# Altium PCB I2C_Expander.PcbDoc
Units mil, origin at the board's own origin, x right, y up, seen from the top; angles counter-clockwise.
Board outline 1240 x 710 mil, 2 copper layers (Top Layer, Bottom Layer); 8 components, 4 nets, 42 pads, 20 vias.
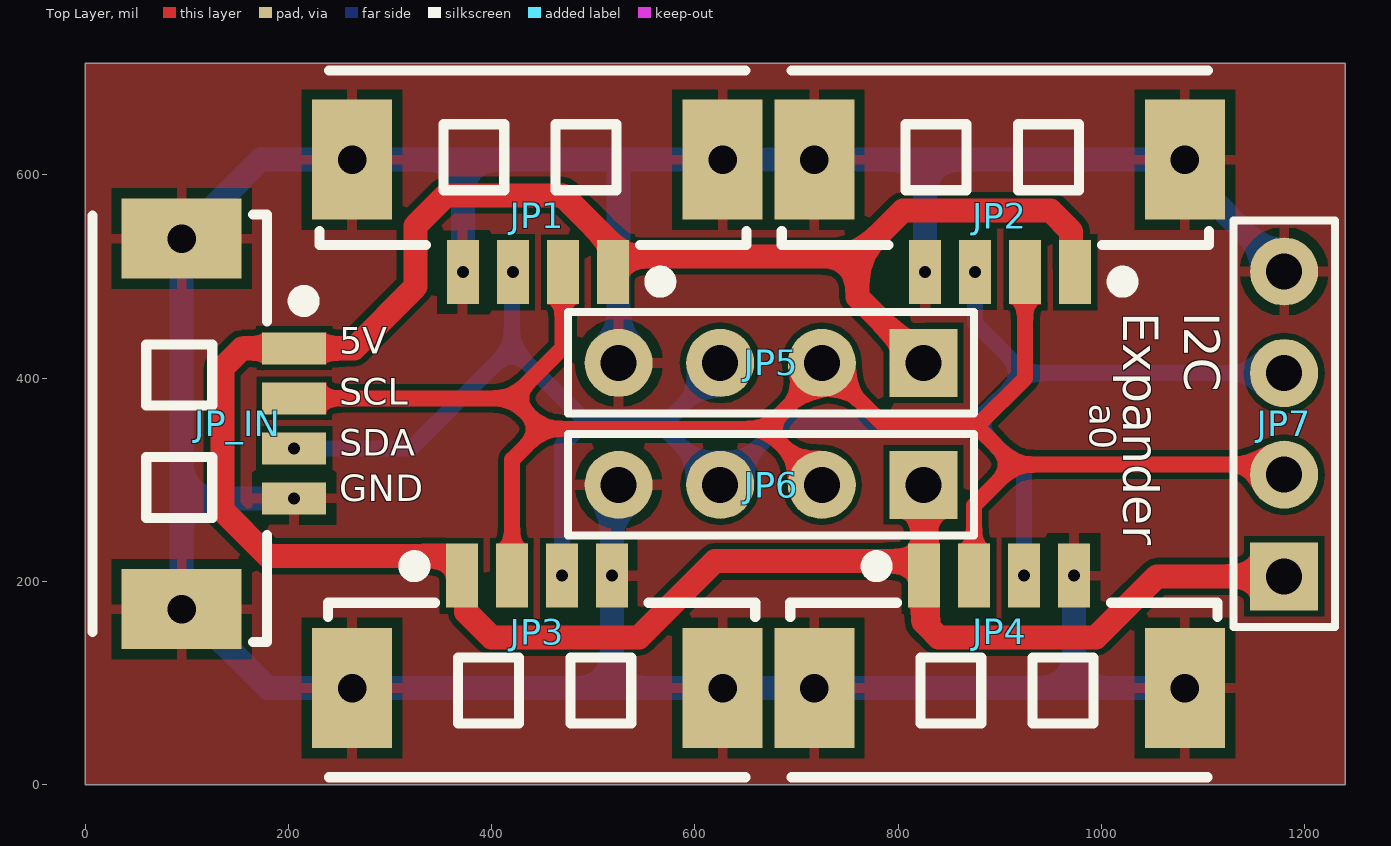
[diagram p0: Top Layer view]
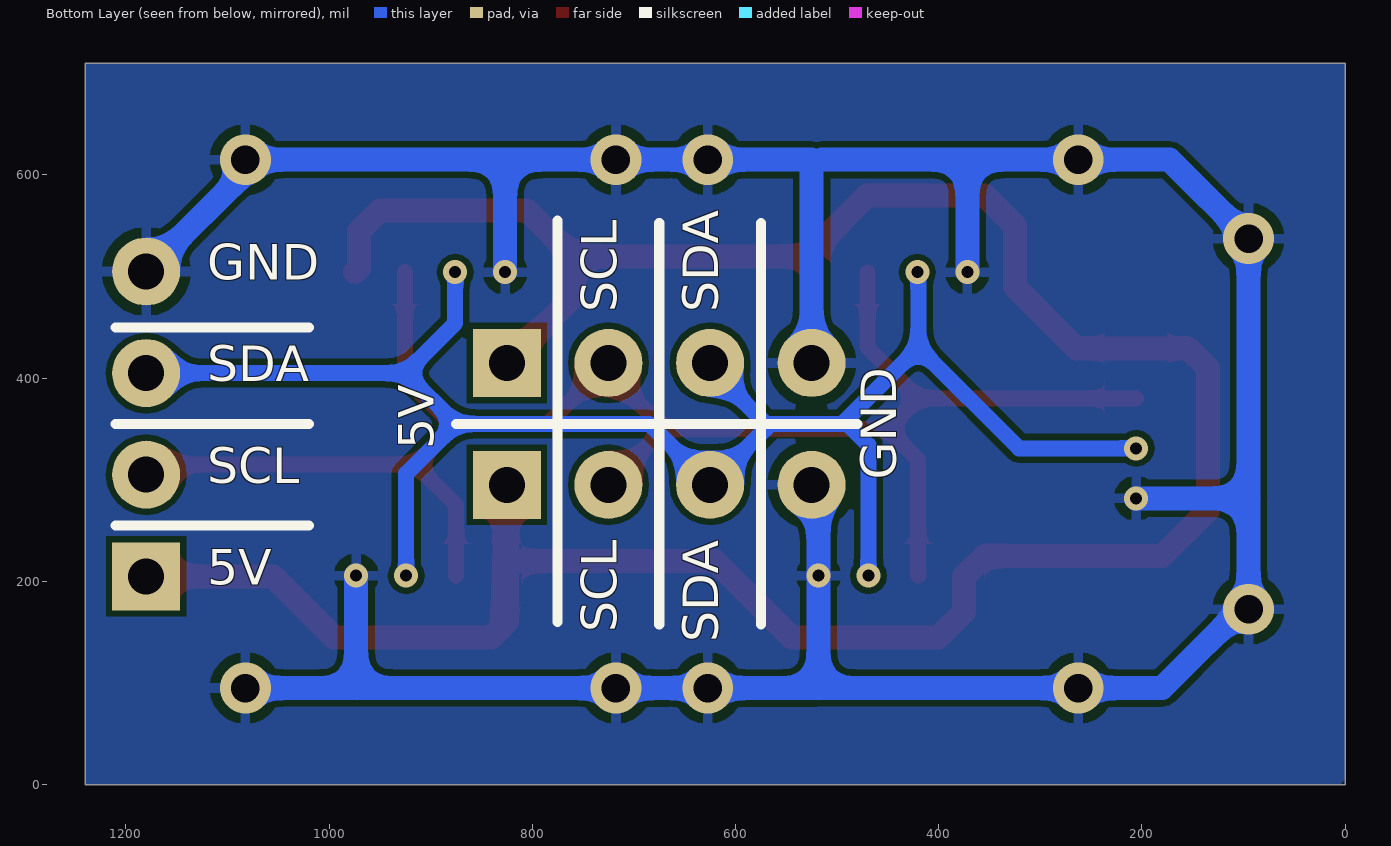
[diagram p1: Bottom Layer view, seen from below]

## Layer stack, top to bottom
Top Solder: solder mask 0.4, Solder Resist, Dk 3.5
Top Layer: signal copper 1.4
Dielectric 1: dielectric 12.6, FR-4, Dk 4.8
Bottom Layer: signal copper 1.4
Bottom Solder: solder mask 0.4, Solder Resist, Dk 3.5

## Board outline
0,0 1240,0 1240,710 0,710

## Design rules (kind name [scope] priority, off if disabled: settings)
Clearance [All] p1: gap=6 ignorepadtopadclearanceinfootprint=FALSE except(0: Arc-Hole Track-Hole SMDPad-Hole THPad-Hole Via-Hole Fill-Hole Poly-Hole Region-Hole Text-Hole)
DiffPairsRouting [All] p1: maxlimit=393.7 minlimit=6 mostfreqgap=10 toplayer_minwidth=6 toplayer_maxwidth=393.7 toplayer_prefwidth=10 bottomlayer_minwidth=6 bottomlayer_maxwidth=393.7 bottomlayer_prefwidth=10 maxuncoupledlength=500
PlaneConnect [All] p1: planeconnectstyle=Relief reliefexpansion=20 reliefentries=4 reliefconductorwidth=20 reliefairgap=10
PolygonConnect [All] p1: connectstyle=Relief reliefconductorwidth=10 reliefentries=4 polygonreliefangle="90 Angle" airgapwidth=10
RoutingTopology [All] p1: topology=Daisy_Simple
RoutingVias [All] p1: holewidth=28 width=50 viastyle="Through Hole" minholewidth=11.81 minwidth=23.62 maxholewidth=98.43 maxwidth=196.85
SolderMaskExpansion [All] p1: expansion=4
UnRoutedNet [All] p1: checkbadconnections=TRUE
Width [All] p1: maxlimit=393.7 minlimit=6 preferedwidth=10
26 further rules are at their usual default settings.

## Components (designator, comment, footprint, x,y, rotation, side; value= is the part's Value field where it differs from the comment)
JP1 "HDR-1X4" "MX 1.25-WS-4P" 445,615 r180 top
JP2 "HDR-1X4" "MX 1.25-WS-4P" 900,615 r180 top locked
JP3 "HDR-1X4" "MX 1.25-WS-4P" 445,95 r0 top locked
JP4 "HDR-1X4" "MX 1.25-WS-4P" 900,95 r0 top locked
JP5 "HDR-1X4" HDR2.54-LI-4P 675,415 r180 top
JP6 "HDR-1X4" HDR2.54-LI-4P 675,295 r180 top
JP7 "HDR-1X4" HDR2.54-LI-4P 1180,355 r90 top
JP_IN "HDR-1X4" "MX 1.25-WS-4P" 95,355 r270 top

## Footprints (in the part's own frame and the unit in brackets; to place one, negate y for a bottom-side part, rotate by r counter-clockwise, add the part's x,y. Pads: shape width x height; smd on the part's side, far side on the other; paste and mask are expansions set on the pad)
HDR2.54-LI-4P [mm] "排针，4脚"
  rect 1.7x1.7 hole 0.9: 1(-3.81,0)
  round 1.7 hole 0.9: 2(-1.27,0) 3(1.27,0) 4(3.81,0)
  silkscreen extent -5.08,-1.27 5.08,1.27, body extent -5.08,-1.27 5.08,1.27, height 8.5
"MX 1.25-WS-4P" [mm] "长：10.15mm，宽：4.2mm，高：3.4mm"
  rect 2x3 smd: 0(-4.632,0) 0(4.632,0)
  rect 0.8x1.6 smd: 1(-1.889,2.811) 2(-0.639,2.811) 3(0.611,2.811) 4(1.861,2.811)
  silkscreen extent -5.23,-2.23 5.45,3.25, body extent -5.07,-2.1 5.07,3.09, height 3.4

## Part data
JP1 JP2 JP3 JP4 JP5 JP6 JP7 JP_IN: library part "Header 4", "4P接插件", BOM名称=4P, 学习资源=www.oooc

## Via types
v1: diameter 50, hole 28, Top Layer to Bottom Layer, 10 vias
v2: diameter 23.62, hole 11.81, Top Layer to Bottom Layer, 10 vias

## Nets (pads, with @x,y where several pads share a name; then routed paths per layer and width w, separated by ;. In a path a pad name is that pad's centre, name@x,y a point inside that pad or via, vN(x,y) a via of type N, cw(c..) or ccw(c..) an arc to the next point about the centre after c; other vN are vias at no path point)
5V: JP1.1 JP2.1 JP3.1 JP4.1 JP5.1 JP6.1 JP7.1 JP_IN.1 | length 2761.2
  Top Layer w23.62: JP5.1 760,480 760,520 ; JP2.1 970.43,508.28 970.43,544.57 950,565 805,565 760,520 ; JP7.1 1055,205 995,145 840,145 830,155 ; 760,520 530,520 470,580 355,580 325,550 325,490 264.36,429.36 JP_IN.1 154.36,429.36 135,410 135,270 180,225 355,225 375,205 375,170 400,145 545,145 620,220 JP4.1@825,220 ; JP4.1@825,220 825,160 830,155 ; JP4.1@825,220 JP6.1 828.19,205.74 830,155
GND: JP1.0 JP1.4 JP2.0 JP2.4 JP3.0 JP3.4 JP4.0 JP4.4 JP5.4 JP6.4 JP7.4 JP_IN.0 JP_IN.4 | length 3378.1
  Bottom Layer w23.62: v2(205.65,281.72) 95,281.72 ; v2(371.72,504.35) 371.72,615 ; 515,615 371.72,615 ; JP6.4 518.28,288.28 v2(518.28,205.65) 518.28,95 ; JP5.4 525,615 v1(627.36,615) v1(717.64,615) 826.72,615 ; v2(826.72,504.35) 826.72,615 ; v2(973.28,205.65) 973.28,95 ; v1(1082.36,95) 973.28,95 ; JP7.4 1070,615 826.72,615 ; 95,281.72 95,180 180,95 v1(262.64,95) 518.28,95 ; 95,281.72 v1(95,537.36) 172.64,615 v1(262.64,615) 371.72,615 ; 518.28,95 v1(627.36,95) v1(717.64,95) 973.28,95
  other v1: 95,172.64 1082.36,615
SCL: JP1.2 JP2.2 JP3.2 JP4.2 JP5.2 JP6.2 JP7.2 JP_IN.2 | length 1742.4
  Top Layer w10: JP1.2@470,504.2 JP1.2
  Top Layer w15.75: JP_IN.2 420.15,380.15 ; JP3.2 420.15,205.95 420.15,319.85 450.3,350 ; JP1.2@470,504.2 470,430 420.15,380.15 ; JP6.2 670,350 ; JP4.2 874.85,274.85 915,315 ; JP2.2 925.15,400.15 877.5,352.5 ; JP7.2 1170,315 915,315 ; 420.15,380.15 450.3,350 ; 450.3,350 670,350 ; 670,350 725,405 JP5.2 785,355 875,355 877.5,352.5 ; 877.5,352.5 915,315
SDA: JP1.3 JP2.3 JP3.3 JP4.3 JP5.3 JP6.3 JP7.3 JP_IN.3 | length 1732.3
  Bottom Layer w10: v2(924.06,205.65) v2@925,206.59
  Bottom Layer w15.75: v2(205.65,330.94) 320.94,330.94 420,430 ; v2(420.94,504.35) 420,503.41 420,430 ; v2(469.06,205.65) 469.06,334.06 490,355 495,355 ; JP5.3 625,410 570,355 ; v2@875,503.41 v2(875.94,504.35) 875.94,454.06 925,405 ; v2(924.06,205.65) 924.06,305.94 875,355 ; JP7.3 925,405 ; 420,430 495,355 ; 495,355 570,355 ; 570,355 570,350 JP6.3 685,355 875,355 ; 875,355 925,405

## Polygon pours and split planes (outlines as drawn)
GND on Top Layer (solid, pour order 8): 1240,710 1240,0 0,0 0,710
GND on Bottom Layer (solid, pour order 10): 1240,710 1240,0 5,0 0,5 0,710

## Silkscreen, mask and mechanical layers (free items; w line width, h text height)
Top Overlay:
  text "I2C / Expander" at 1010,465 h60 r270
  text "5V" at 250,415 h45
  text "a0" at 980,375 h45 r270
  text "SCL" at 250,365 h45
  text "SDA" at 250,315 h45
  text "GND" at 250,270 h45
Bottom Overlay:
  lines w10: 480,355 875,355 ; 575,157.5 575,552.5 ; 675,157.5 675,552.5 ; 775,160 775,555 ; 1020,255 1210,255 ; 1020,355 1210,355 ; 1020,450 1210,450
  text "GND" at 1120,485 h60
  text "SDA" at 605,465 h60 r270
  text "SCL" at 705,465 h60 r270
  text "SDA" at 1120,385 h60
  text "5V" at 885,330 h60 r270
  text "GND" at 430,300 h60 r270
  text "SCL" at 1120,285 h60
  text "5V" at 1120,185 h60
  text "SCL" at 705,150 h60 r270
  text "SDA" at 605,140 h60 r270
Mechanical 1:
  lines w10: 0,35 ccw(c35,35) 35,0 1205,0 ccw(c1205,35) 1240,35 1240,675 ccw(c1205,675) 1205,710 35,710 ccw(c35,675) 0,675 0,35
Mechanical 13:
  lines w10: 0,35 ccw(c35,35) 35,0 1205,0 ccw(c1205,35) 1240,35 1240,675 ccw(c1205,675) 1205,710 35,710 ccw(c35,675) 0,675 0,35